# Altium PCB microB.PcbDoc
Units mil, origin at the board's own origin, x right, y up, seen from the top; angles counter-clockwise.
Board outline 800 x 400 mil, 2 copper layers (Top, Bottom); 7 components, 5 nets, 22 pads, 2 vias.
Unrouted connection lines stored in the file: 2.
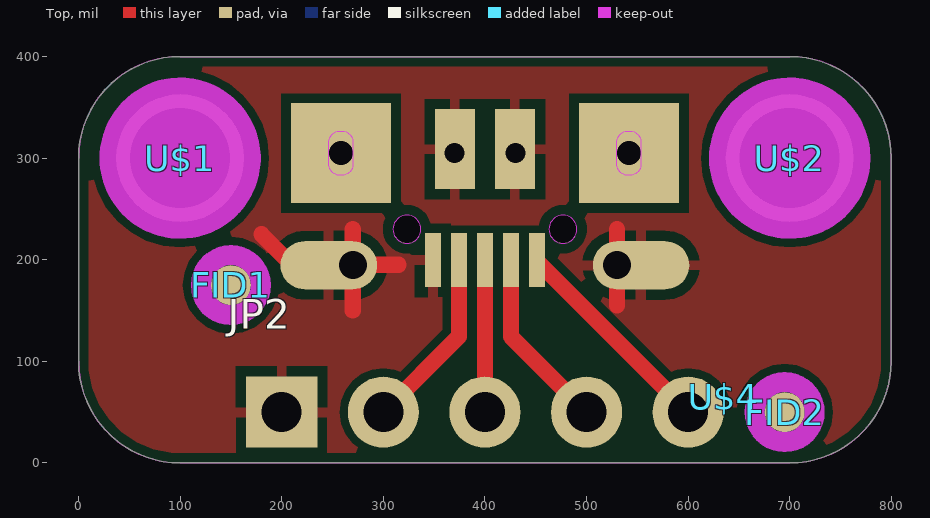
[diagram p0: Top view]
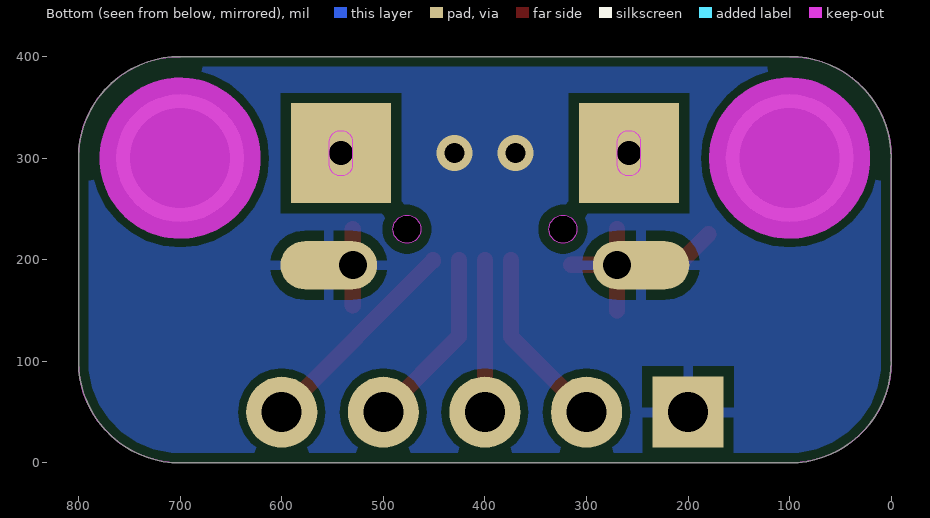
[diagram p1: Bottom view, seen from below]

## Layer stack, top to bottom
Top Solder: solder mask 0.4, Solder Resist, Dk 3.5
Top: signal copper 1.378
Dielectric 1: dielectric 12.6, FR-4, Dk 4.8
Bottom: signal copper 1.378
Bottom Solder: solder mask 0.4, Solder Resist, Dk 3.5

## Board outline
0,300 cw(c100,300) 100,400 700,400 cw(c700,300) 800,300 800,100 cw(c700,100) 700,0 100,0 cw(c100,100) 0,100
cut-out: 258.27,283.15 cw(c257.29,293.98) 246.46,292.99 246.46,316.61 cw(c257.29,315.63) 258.27,326.46 cw(c259.25,315.63) 270.08,316.61 270.08,292.99 cw(c259.25,293.98)
cut-out: 553.54,316.61 553.54,292.99 cw(c542.72,293.98) 541.73,283.15 cw(c540.75,293.98) 529.92,292.99 529.92,316.61 cw(c540.75,315.63) 541.73,326.46 cw(c542.71,315.63)
cut-out: 323.23,216.22 ccw(c323.23,230) 337.01,230 ccw(c323.23,230) 323.23,243.78 ccw(c323.23,230) 309.45,230 ccw(c323.23,230)
cut-out: 476.77,216.22 ccw(c476.77,230) 490.55,230 ccw(c476.77,230) 476.77,243.78 ccw(c476.77,230) 462.99,230 ccw(c476.77,230)

## Design rules (kind name [scope] priority, off if disabled: settings)
BoardOutlineClearance mdCopperDimension [All] p1: gap=10 ignorepadtopadclearanceinfootprint=FALSE except(0: Arc-SplitContinuation Track-SplitContinuation SMDPad-SplitContinuation THPad-SplitContinuation Via-SplitContinuation Fill-SplitContinuation Poly-SplitContinuation Region-SplitContinuation Text-SplitContinuation)
Clearance "Clearance (Same Net)" [All] p1: gap=8 ignorepadtopadclearanceinfootprint=FALSE
Clearance [All] p2: gap=8 ignorepadtopadclearanceinfootprint=FALSE
HoleSize [All] p1: absolutevalues=TRUE maxlimit=100000 minlimit=16 maxpercent=80.000 minpercent=20.000
HoleToHoleClearance mdDrill [All] p1: gap=8 allowstackedmicrovias=TRUE
MinimumSolderMaskSliver [All] p1 off: minsoldermaskwidth=10
PasteMaskExpansion Expansion_SMDPaste_OFF [InPadClass('SMDPaste_OFF')] p1: expansion=0
PasteMaskExpansion mlMinCreamFrame [All] p2: expansion=0
PolygonConnect PolygonConnect_For_PolygonThermal_ON_Width100000_Gap100000 [InPolygonClass('PolygonThermal_ON_Width100000_Gap100000') vs Not IsVia] p1: connectstyle=Relief reliefconductorwidth=10 reliefentries=4 polygonreliefangle="90 Angle" airgapwidth=10
PolygonConnect ThermalVias [IsVia] p2: connectstyle=Direct reliefconductorwidth=10 reliefentries=4 polygonreliefangle="90 Angle" airgapwidth=10
PolygonConnect [All] p3: connectstyle=Relief reliefconductorwidth=10 reliefentries=4 polygonreliefangle="90 Angle" airgapwidth=10
RoutingVias [All] p1: holewidth=16 width=32 viastyle="Through Hole" minholewidth=16 minwidth=32 maxholewidth=100 maxwidth=100
SolderMaskExpansion Expansion_SMDSolder_OFF [InPadClass('SMDSolder_OFF')] p1: expansion=0 istentingtop=FALSE
SolderMaskExpansion mlMinStopFrame [All] p2: expansion=4 istentingtop=FALSE
Width [All] p1: maxlimit=10000 minlimit=10 preferedwidth=10
26 further rules are at their usual default settings.

## Classes and differential pairs
polygon class PolygonThermal_ON_Width100000_Gap100000: Polygon_1_Net_GND Polygon_2_Net_GND
pad class SMDSolder_OFF: X2-D+ X2-D- X2-GND X2-ID X2-VBUS
pad class SMDPaste_OFF: FID1-1 FID2-1

## Components (designator, comment, footprint, x,y, rotation, side; value= is the part's Value field where it differs from the comment)
FID1 "" FIDUCIAL_1MM 150,175 r0 top
FID2 "" FIDUCIAL_1MM 695,50 r0 top
JP2 "" 1X05_ROUND_70 400,50 r0 top
U$1 "" MOUNTINGHOLE_2.5_PLATED 100,300 r0 top
U$2 "" MOUNTINGHOLE_2.5_PLATED 700,300 r0 top
U$4 "" ADAFRUIT_3.5MM 635,65 r0 top
X2 "" 4UCONN_20329 400,230 r180 top

## Footprints (in the part's own frame and the unit in brackets; to place one, negate y for a bottom-side part, rotate by r counter-clockwise, add the part's x,y. Pads: shape width x height; smd on the part's side, far side on the other; paste and mask are expansions set on the pad)
1X05_ROUND_70 [mil] "1X05_ROUND_70"
  rect 70x70 / inner round 64.67 / far side rect 70x70 hole 39.37: 1(-200,0)
  round 70 hole 39.37: 2(-100,0) 3(0,0) 4(100,0) 5(200,0)
  body extent -254,-35 235,35, height 150
4UCONN_20329 [mm] "4UCONN_20329"
  rect 1x2 smd: BASE@1(-0.75,-2) BASE@2(0.75,-2)
  rect 0.4x1.35 smd mask+0: D+(0,0.775) D-(-0.65,0.775) GND(1.3,0.775) ID(0.65,0.775) VBUS(-1.3,0.775)
  oval 2.416x1.208 hole 0.7 copper offset -0.604,0: SPRT@1(-3.3,0.9)
  oval 2.416x1.208 hole 0.7 copper offset 0.604,0: SPRT@2(3.3,0.9)
  rect 2.5x2.5 / inner round 2.31 / far side rect 2.5x2.5 hole 0.6: SPRT@3(-3.6,-1.9) SPRT@4(3.6,-1.9)
  body extent -5.12,-4.97 5.12,1.52, height 3.81
ADAFRUIT_3.5MM [mil] "ADAFRUIT_3.5MM"
FIDUCIAL_1MM [mm] "FIDUCIAL_1MM"
  rrect100% 1x1 smd paste+0: 1(0,0)
  Top keep-out lines w0.5: -0.75,0 ccw(c0,0) 0,-0.75 ; -0.75,0 cw(c0,0) 0,0.75 ; -0.75,0 ccw(c0,0) 0,-0.75 ; -0.75,0 cw(c0,0) 0,0.75 ; 0,-0.75 ccw(c0,0) 0.75,0 ; 0,-0.75 ccw(c0,0) 0.75,0 ; 0,0.75 cw(c0,0) 0.75,0 ; 0,0.75 cw(c0,0) 0.75,0
  body extent -1.01,-1.01 1.01,1.01, height 3.81
MOUNTINGHOLE_2.5_PLATED [mil] "MOUNTINGHOLE_2.5_PLATED"
  round 125.98 hole 98.43: P$1(0,0)
  Top keep-out circle w80: c0,0 r39.37
  Top keep-out circle w80: c0,0 r39.37
  Bottom keep-out circle w80: c0,0 r39.37
  Bottom keep-out circle w80: c0,0 r39.37
  body extent -80,-80 80,80, height 150

## Part data
FID1 FID2: library part FIDUCIAL_1MM, PackageName=FIDUCIAL_1MM
JP2: library part 1X05_ROUND_70, PackageName=1X05_ROUND_70
U$1 U$2: library part MOUNTINGHOLE_2.5_PLATED, PackageName=MOUNTINGHOLE_2.5_PLATED
U$4: library part ADAFRUIT_3.5MM, PackageName=ADAFRUIT_3.5MM
X2: library part 4UCONN_20329, PackageName=4UCONN_20329

## Free pads (board coordinates)
  round 27.56 hole 27.56 unplated: MH1(476.77,230) MH2(323.23,230)

## Via types
v1: diameter 35.69/35.69 (per signal layer), hole 19.69, Top to Bottom, 2 vias

## Nets (pads, with @x,y where several pads share a name; then routed paths per layer and width w, separated by ;. In a path a pad name is that pad's centre, name@x,y a point inside that pad or via, vN(x,y) a via of type N, cw(c..) or ccw(c..) an arc to the next point about the centre after c; other vN are vias at no path point)
D+: JP2.3 X2.D+ | length 149.5
  Top w16: JP2.3 X2.D+
D-: JP2.4 X2.D- | length 180.3
  Top w16: X2.D- 425.59,124.41 JP2.4
GND: JP2.1 X2.BASE@1 X2.BASE@2 X2.GND X2.SPRT@1 X2.SPRT@2 X2.SPRT@3 X2.SPRT@4 | length 237.7
  Top w16: 180,225 205,200 215,200 ; 270,150 270,185 ; 270,195 270,230 ; 275,195 315,195 ; v1(370,305) 370,308.27 v1@370.47,308.74 ; v1@429.53,308.74 430,308.27 v1(430,305) ; 529.92,194.57 529.92,199.92 ; 530,155 530,190 525,195 529.92,199.92 ; 530,200 529.92,199.92 ; 530,210 530,230
ID: JP2.2 X2.ID | length 180.3
  Top w16: JP2.2 374.41,124.41 X2.ID
VBUS: JP2.5 X2.VBUS | length 211.1
  Top w16: X2.VBUS 451.18,198.82 JP2.5
pads on no net: FID1.1 FID2.1 U$1.P$1 U$2.P$1

## Polygon pours and split planes (outlines as drawn)
GND on Top "Polygon_1_Net_GND" (solid, remove dead copper, pour order 1): -10.06,410 -4.94,-5 805.06,-5 799.94,410
GND on Bottom "Polygon_2_Net_GND" (solid, remove dead copper, pour order 0): -10.06,415 -4.94,0 805.06,0 799.94,415

## Keep-outs
Keep-Out Layer:
  the board outline again, w0

## Silkscreen, mask and mechanical layers (free items; w line width, h text height)
Dimension:
  the board outline again, w0
tPlace:
  text "USB" at 61.34,103.25 h42.5 r90
  text "D-" at 475.76,102.09 h34
  text "GND" at 150.6,93.93 h34
  text "ID" at 270.43,93.93 h34
  text "D+" at 367.6,93.93 h34
  text "5V" at 567.6,93.93 h34
  text "Micro" at 111.34,19.31 h42.5 r90

## Text inside footprints (layer, text, board x,y; h text height)
X2: tDocu "PCB EDGE" at 400,387.48 h24.8 r180